# EAGLE board schema_v4_3 (EAGLE 6.5.0)
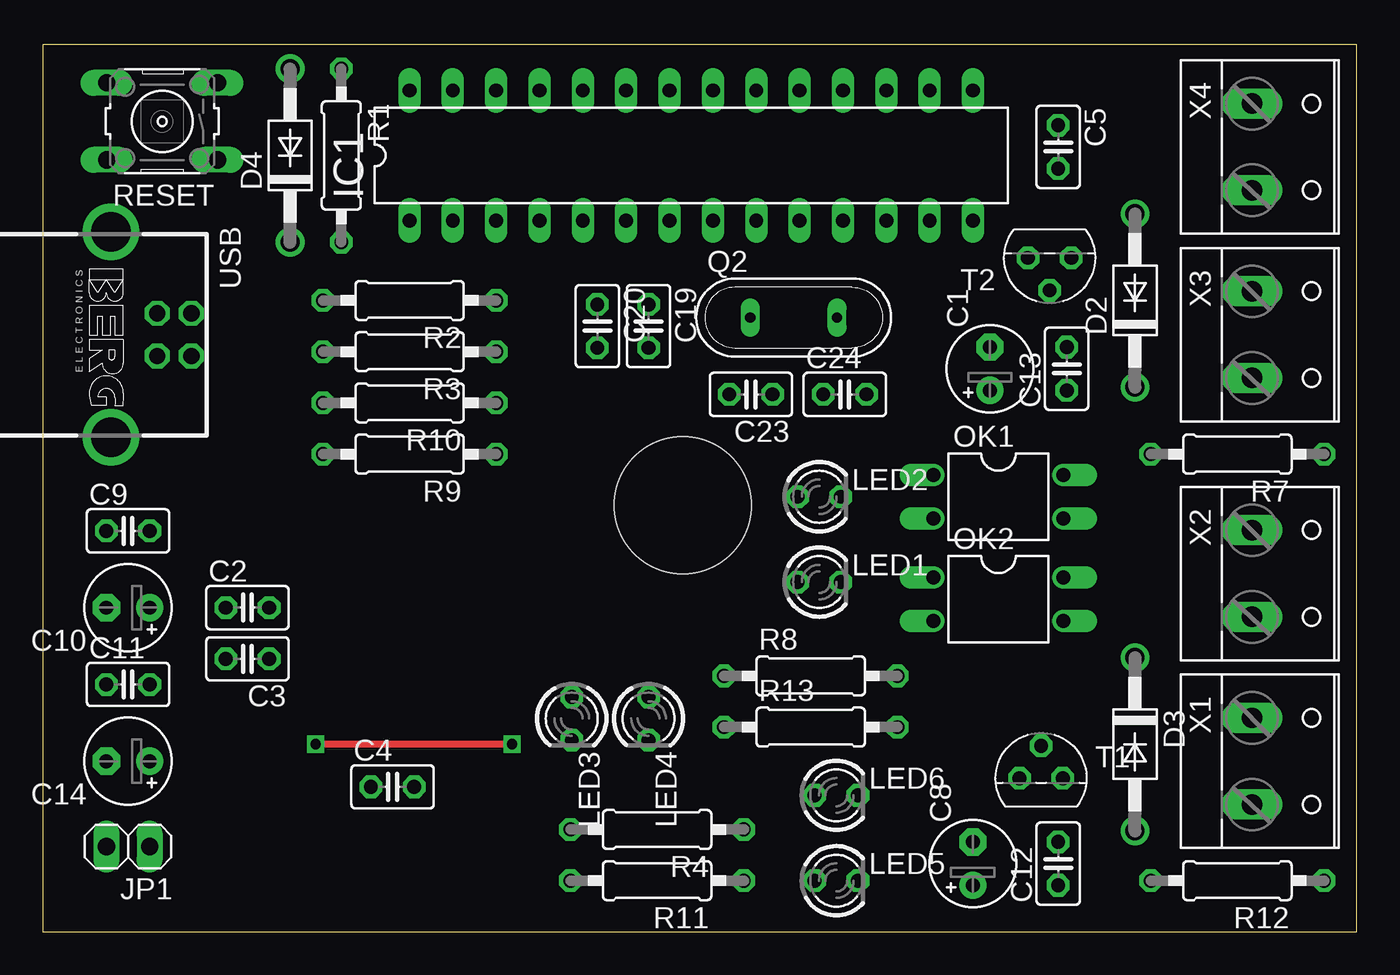
[diagram p0: board, top side]
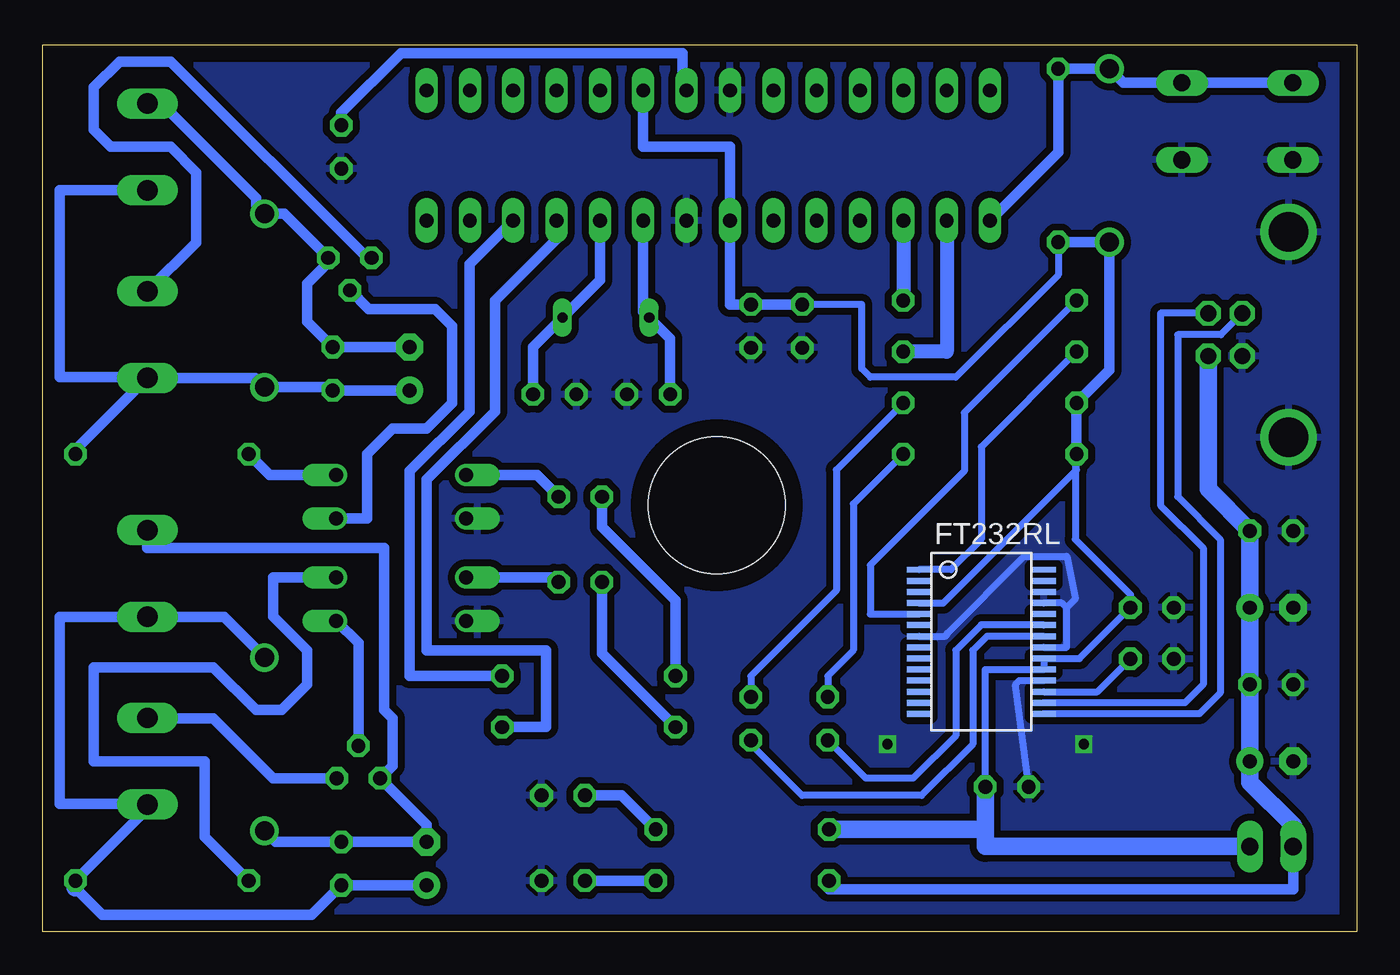
[diagram p1: board, bottom side, seen from below]

Size 77 x 52 mm. Coordinates in mm from the lower left corner, seen from the top.
Outline: 0,0 77,0 77,52 0,52 0,0
Copper layers (1*16): Top 0.035mm / dielectric 1.5mm / Bottom 0.035mm
Design rules "default": minimum track width 10mil, minimum drill 24mil, track to track 8mil, track to pad 8mil, pad to pad 8mil, via to via 8mil, smd to smd 8mil, copper to edge 40mil, drill to drill 8mil, minimum pad ring 10mil, minimum via ring 8mil, stop-mask expansion 4mil, vias tented up to drill 0mil, thermal gap 10mil
Net classes: 0 default: width 0.203 mm
Holes 8 mm at 37.5,25

## Footprints (pad centres in the part's own frame; a part is rotated, then mirrored left to right if it is on the bottom)
E2,5-5 = drill 0.813 pad 1.6: + -1.27,0 | drill 0.813 pad 1.6 octagon: - 1.27,0
C025-025X050 = drill 0.813 octagon: 1 -1.27,0; 2 1.27,0
DO41-10 = drill 1.118: A 5.08,0; C -5.08,0
SSOP28DB = smd 0.348 x 1.397: 1 -4.225,-3.656; 2 -3.575,-3.656; 3 -2.925,-3.656; 4 -2.275,-3.656; 5 -1.625,-3.656; 6 -0.975,-3.656; 7 -0.325,-3.656; 8 0.325,-3.656; 9 0.975,-3.656; 10 1.625,-3.656; 11 2.275,-3.656; 12 2.925,-3.656; 13 3.575,-3.656; 14 4.225,-3.656; 15 4.225,3.656; 16 3.575,3.656; 17 2.925,3.656; 18 2.275,3.656; 19 1.625,3.656; 20 0.975,3.656; 21 0.325,3.656; 22 -0.325,3.656; 23 -0.975,3.656; 24 -1.625,3.656; 25 -2.275,3.656; 26 -2.925,3.656; 27 -3.575,3.656; 28 -4.225,3.656
DIL28-3 = drill 0.813 long: 1 -16.51,-3.81; 2 -13.97,-3.81; 3 -11.43,-3.81; 4 -8.89,-3.81; 5 -6.35,-3.81; 6 -3.81,-3.81; 7 -1.27,-3.81; 8 1.27,-3.81; 9 3.81,-3.81; 10 6.35,-3.81; 11 8.89,-3.81; 12 11.43,-3.81; 13 13.97,-3.81; 14 16.51,-3.81; 15 16.51,3.81; 16 13.97,3.81; 17 11.43,3.81; 18 8.89,3.81; 19 6.35,3.81; 20 3.81,3.81; 21 1.27,3.81; 22 -1.27,3.81; 23 -3.81,3.81; 24 -6.35,3.81; 25 -8.89,3.81; 26 -11.43,3.81; 27 -13.97,3.81; 28 -16.51,3.81
1X02 = drill 1.016 long: 1 -1.27,0; 2 1.27,0
LED3MM = drill 0.813 octagon: A -1.27,0; K 1.27,0
DIL04 = drill 0.813 offset: 1 -1.27,-3.81; 2 1.27,-3.81; 3 1.27,3.81; 4 -1.27,3.81
QS = drill 0.61 long: 1 -2.54,0; 2 2.54,0
0207/10 = drill 0.813 octagon: 1 -5.08,0; 2 5.08,0
B3F-10XX = drill 1.016 long: 1 -3.251,2.261; 2 3.251,2.261; 3 -3.251,-2.261; 4 3.251,-2.261
TO92 = drill 0.813 octagon: 1 1.27,0; 2 0,1.905; 3 -1.27,0
PN61729-S = drill 0.95 octagon: 1 1.25,4.71; 2 -1.25,4.71; 3 -1.25,2.71; 4 1.25,2.71 | drill 2.3 pad 2.9: S1 -6.02,0; S2 6.02,0
W237-132 = drill 1.194 long: 1 -2.54,-0.635; 2 2.54,-0.635

## Placement (x,y rotation side)
C1  1uF  [E2,5-5]  55.5,33 90 top
C2  100nF  [C025-025X050]  12,19 0 top
C3  100nF  [C025-025X050]  12,16 180 top
C4  100nF  [C025-025X050]  20.5,8.5 0 top
C5  100nF  [C025-025X050]  59.5,46 270 top
C8  1uF  [E2,5-5]  54.5,4 90 top
C9  100nF  [C025-025X050]  5,23.5 0 top
C10  1uF  [E2,5-5]  5,19 180 top
C11  100nF  [C025-025X050]  5,14.5 0 top
C12  100nF  [C025-025X050]  59.5,4 90 top
C13  100nF  [C025-025X050]  60,33 90 top
C14  4,7uF  [E2,5-5]  5,10 180 top
C19  100nF  [C025-025X050]  35.5,35.5 270 top
C20  100nF  [C025-025X050]  32.5,35.5 270 top
C23  22pF  [C025-025X050]  41.5,31.5 180 top
C24  22pF  [C025-025X050]  47,31.5 0 top
D2  1N4001  [DO41-10]  64,37 90 top
D3  1N4001  [DO41-10]  64,11 270 top
D4  1N4001  [DO41-10]  14.5,45.5 90 top
FT232RL  FT232RL  [SSOP28DB]  22,17 270 bottom
IC1  MEGA8-P  [DIL28-3]  38,45.5 0 top
JP1  [1X02]  5,5 180 top
LED1  [LED3MM]  45.5,20.5 0 top
LED2  [LED3MM]  45.5,25.5 0 top
LED3  [LED3MM]  31,12.5 270 top
LED4  [LED3MM]  35.5,12.5 270 top
LED5  [LED3MM]  46.5,3 0 top
LED6  [LED3MM]  46.5,8 0 top
OK1  LTV816  [DIL04]  56,25.5 270 top
OK2  LTV816  [DIL04]  56,19.5 270 top
Q2  [QS]  44,36 0 top
R1  22k  [0207/10]  17.5,45.5 270 top
R2  1k  [0207/10]  21.5,37 180 top
R3  1k  [0207/10]  21.5,34 180 top
R4  330  [0207/10]  36,6 180 top
R7  10k  [0207/10]  70,28 180 top
R8  330  [0207/10]  45,15 0 top
R9  330  [0207/10]  21.5,28 180 top
R10  330  [0207/10]  21.5,31 180 top
R11  330  [0207/10]  36,3 180 top
R12  10k  [0207/10]  70,3 180 top
R13  330  [0207/10]  45,12 0 top
RESET  [B3F-10XX]  7,47.5 180 top
T1  BC547  [TO92]  58.5,9 0 top
T2  BC547  [TO92]  59,39.5 180 top
USB  PN61729-S  [PN61729-S]  4,35 270 top
X1  [W237-132]  71.5,10 270 top
X2  [W237-132]  71.5,21 270 top
X3  [W237-132]  71.5,35 270 top
X4  [W237-132]  71.5,46 270 top

## Library data of the parts
C1-C5 C8-C14 C19 C20 C23 C24 R1-R4 R7-R13 = rcl
D2-D4 = diode
FT232RL = ftdichip-5
IC1 = atmel; OC_FARNELL: unknown; OC_NEWARK: unknown
JP1 = pinhead
LED1-LED6 = led
OK1 OK2 = optocoupler; OC_FARNELL: unknown; OC_NEWARK: unknown
Q2 = special
RESET = switch-omron; MPN: B3F-1000; OC_FARNELL: 176432; OC_NEWARK: 36M3542
T1 T2 = transistor
USB = con-berg; OC_FARNELL: unknown; OC_NEWARK: unknown
X1-X4 = con-wago-508; OC_FARNELL: unknown; OC_NEWARK: unknown

## Nets
5V0: C2.2 C4.2 C19.1 C20.1 D4.C FT232RL.4 FT232RL.19 FT232RL.20 IC1.7 IC1.20 JP1.1 R1.2 R4.2 R9.2 R10.2
5V0_USB: C9.2 C10.+ C11.2 C14.+ JP1.2 R11.2 USB.1
GND: C2.1 C3.2 C4.1 C5.2 C9.1 C10.- C11.1 C14.- C19.2 C20.2 C23.1 C24.1 FT232RL.7 FT232RL.18 FT232RL.21 FT232RL.25 FT232RL.26 IC1.8 IC1.22 LED5.K LED6.K OK1.2 OK2.2 RESET.1 RESET.2 USB.4 USB.S1 USB.S2
MOTOR1: IC1.11 R13.2
MOTOR2: IC1.12 R8.2
N$1: IC1.3 R2.1
N$2: IC1.2 R3.1
N$3: LED6.A R4.1
N$4: LED1.A R13.1
N$5: LED1.K OK2.1
N$6: LED2.A R8.1
N$8: LED3.A R9.1
N$9: LED4.A R10.1
N$10: LED5.A R11.1
N$11: C1.+ C13.1 D2.C R7.1 X3.2 X4.2
N$12: LED2.K OK1.1
N$13: C1.- C13.2 D2.A T2.3 X4.1
N$14: OK1.3 T2.2
N$15: OK2.4 R12.2
N$16: T1.1 X1.1
N$17: C8.+ C12.1 D3.C R12.1 X1.2 X2.2
N$18: C8.- C12.2 D3.A T1.3 X2.1
N$19: OK2.3 T1.2
N$26: C5.1 IC1.21
N$29: C23.2 IC1.9 Q2.1
N$35: C24.2 IC1.10 Q2.2
N$41: FT232RL.23 LED3.K
N$42: FT232RL.22 LED4.K
N$96: C3.1 FT232RL.17
N$104: OK1.4 R7.2
N$107: T2.1 X3.1
RESET: D4.A IC1.1 R1.1 RESET.3 RESET.4
RXD: FT232RL.1 R3.2
TXD: FT232RL.5 R2.2
USBDM: FT232RL.16 USB.2
USBDP: FT232RL.15 USB.3

## Tracks (layer width: path | path; a pad name or v marks a point on that pad's centre or on a via)
5V0
  Bottom 0.406: R1.2 17.5,38.5 23.5,32.5 28.5,32.5 29,33 29,36.77 C20.1 | C4.2 21.77,15.38 FT232RL.19 FT232RL.20 16.25,16.02 C2.2 13.27,19.77 16.5,23 16.5,27.92 R9.2 16.42,27.08 24.23,19.27 FT232RL.4
  Bottom 0.61: R1.2 D4.C 14.5,32.92 R10.2 R9.2 | IC1.20 41.81,46 36.73,46 IC1.7 36.73,36.77 C19.1 C20.1
  Bottom 1.016: JP1.1 21.77,5 21.77,6 | 21.77,6 C4.2 | 21.77,6 R4.2
5V0_USB
  Bottom 0.61: JP1.2 3.73,2.5 30.92,2.5 R11.2
  Bottom 1.016: JP1.2 3.73,6.23 6.27,8.77 C14.+ C11.2 C10.+ C9.2 8.71,25.94 USB.1
GND  (via drill 0.6)
  Top 0.406: v27.5,11 v16,11
  Bottom 0.406: FT232RL.21 17,16.68 17,19 | 17,19 17.27,19.27 FT232RL.25 | FT232RL.7 24.18,17.32 arc-90 24,17.5 19.5,22 17,22 16.5,19.5 17,19 | C4.1 20,14.5 19.77,14.72 FT232RL.18
  pour Bottom (isolate 0.406): 0,52 77,52 77,0 0,0
MOTOR1
  Bottom 0.61: R13.2 47.5,12 47.5,16.5 54.5,16.5 54.5,26.5 50.5,30.5 50.5,37 46.89,40.61 IC1.11
MOTOR2
  Bottom 0.61: IC1.12 52,39.12 52,30.5 55.5,27 55.5,15 R8.2
N$1
  Bottom 0.813: IC1.3 R2.1
N$2
  Bottom 0.813: IC1.2 24.03,34 R3.1
N$3
  Bottom 0.61: LED6.A 43.08,8 R4.1
N$4
  Bottom 0.61: LED1.A 44.23,16.31 R13.1
N$5
  Bottom 0.61: LED1.K 47.04,20.77 OK2.1
N$6
  Bottom 0.61: R8.1 39.92,19.42 44.23,23.73 LED2.A
N$8
  Bottom 0.406: R9.1 29.5,25.08 29.5,16.5 31,15 LED3.A
N$9
  Bottom 0.406: R10.1 30.5,27.08 30.5,20 35.5,15 LED4.A
N$10
  Bottom 0.61: R11.1 LED5.A
N$11
  Bottom 0.61: R7.1 75.08,28.25 X3.2 | X4.2 76,43.46 76,32.5 70.86,32.5 X3.2 | X3.2 64.54,32.46 D2.C 60.19,31.92 C13.1 C1.+
N$12
  Bottom 0.61: LED2.K 48.04,26.77 OK1.1
N$13
  Bottom 0.61: X4.1 70.04,48.54 64.5,43 64.5,42.58 D2.A 62.85,42.08 T2.3 60.27,39.23 61.5,38 61.5,35.77 C13.2 C1.-
N$14
  Bottom 0.61: T2.2 57.91,36.5 54,36.5 53,35.5 53,31 54.5,29.5 56.5,29.5 58,28 58,24.23 OK1.3
N$15
  Bottom 0.61: R12.2 67.5,5.58 67.5,10 74,10 74,15.5 67,15.5 64.5,13 63,13 61.5,14.5 61.5,16.5 63.5,18.5 63.5,20.77 OK2.4
N$16
  Bottom 0.61: T1.1 63.5,9 67,12.5 70.83,12.5 X1.1
N$17
  Bottom 0.61: X1.2 70.86,7.21 R12.1 | C8.+ C12.1 61.23,1 73.5,1 75.08,2.58 | D3.C 66.38,18.46 X2.2 76,18.46 76,7.5 70.86,7.5
  Bottom 1.016: 75.08,2.58 R12.1 | 70.86,7.5 X1.2
N$18
  Bottom 0.61: D3.A 63.35,5.27 C12.2 C8.- 54.5,6.27 T1.3 56.5,9.73 56.5,12.5 57,13 57,22.5 70.86,22.5 X2.1
N$19
  Bottom 0.61: OK2.3 58.5,16.92 T1.2
N$26
  Bottom 0.61: IC1.21 39.5,49.54 39.5,51.5 56,51.5 59.5,48 C5.1
N$29
  Bottom 0.61: IC1.9 41.81,36.35 Q2.1 40.23,34.77 C23.2
N$35
  Bottom 0.61: IC1.10 44.35,38.19 Q2.2 48.27,34.27 C24.2
N$41
  Bottom 0.406: FT232RL.23 18.37,18 22,18 23.5,16.5 23.5,11.5 26,9 28.77,9 LED3.K
N$42
  Bottom 0.406: LED4.K 35.5,11 32.5,8 25.5,8 22.5,11 22.5,16.5 21.68,17.32 FT232RL.22
N$96
  Bottom 0.406: FT232RL.17 15.2,14.07 C3.1
N$104
  Bottom 0.61: OK1.4 63.69,26.77 R7.2
N$107
  Bottom 0.61: X3.1 68,40.41 68,44.5 69.5,46 73,46 74,47 74,49.5 72.5,51 69.5,51 58,39.5 T2.1
RESET
  Bottom 0.61: RESET.4 RESET.3 13.68,49.76 D4.A R1.1 17.5,45.68 IC1.1
RXD
  Bottom 0.406: R3.2 22,28.42 22,23 23.77,21.23 FT232RL.1
TXD
  Bottom 0.406: R2.2 23,30.42 23,27 28.5,21.5 28.5,18.62 FT232RL.5
USBDM
  Bottom 0.406: USB.2 11.5,36.25 11.5,25 9,22.5 9,14.5 10.07,13.43 FT232RL.16
USBDP
  Bottom 0.406: USB.3 7.96,35 10.5,35 10.5,25.5 8,23 8,14 9.22,12.78 FT232RL.15